# Altium PCB TP2_ESP8266.PcbDoc
Units mm, origin at the board's own origin, x right, y up, seen from the top; angles counter-clockwise.
Board outline 60 x 60 mm, 2 copper layers (Top Layer, Bottom Layer); 33 components, 33 nets, 115 pads, 25 vias.
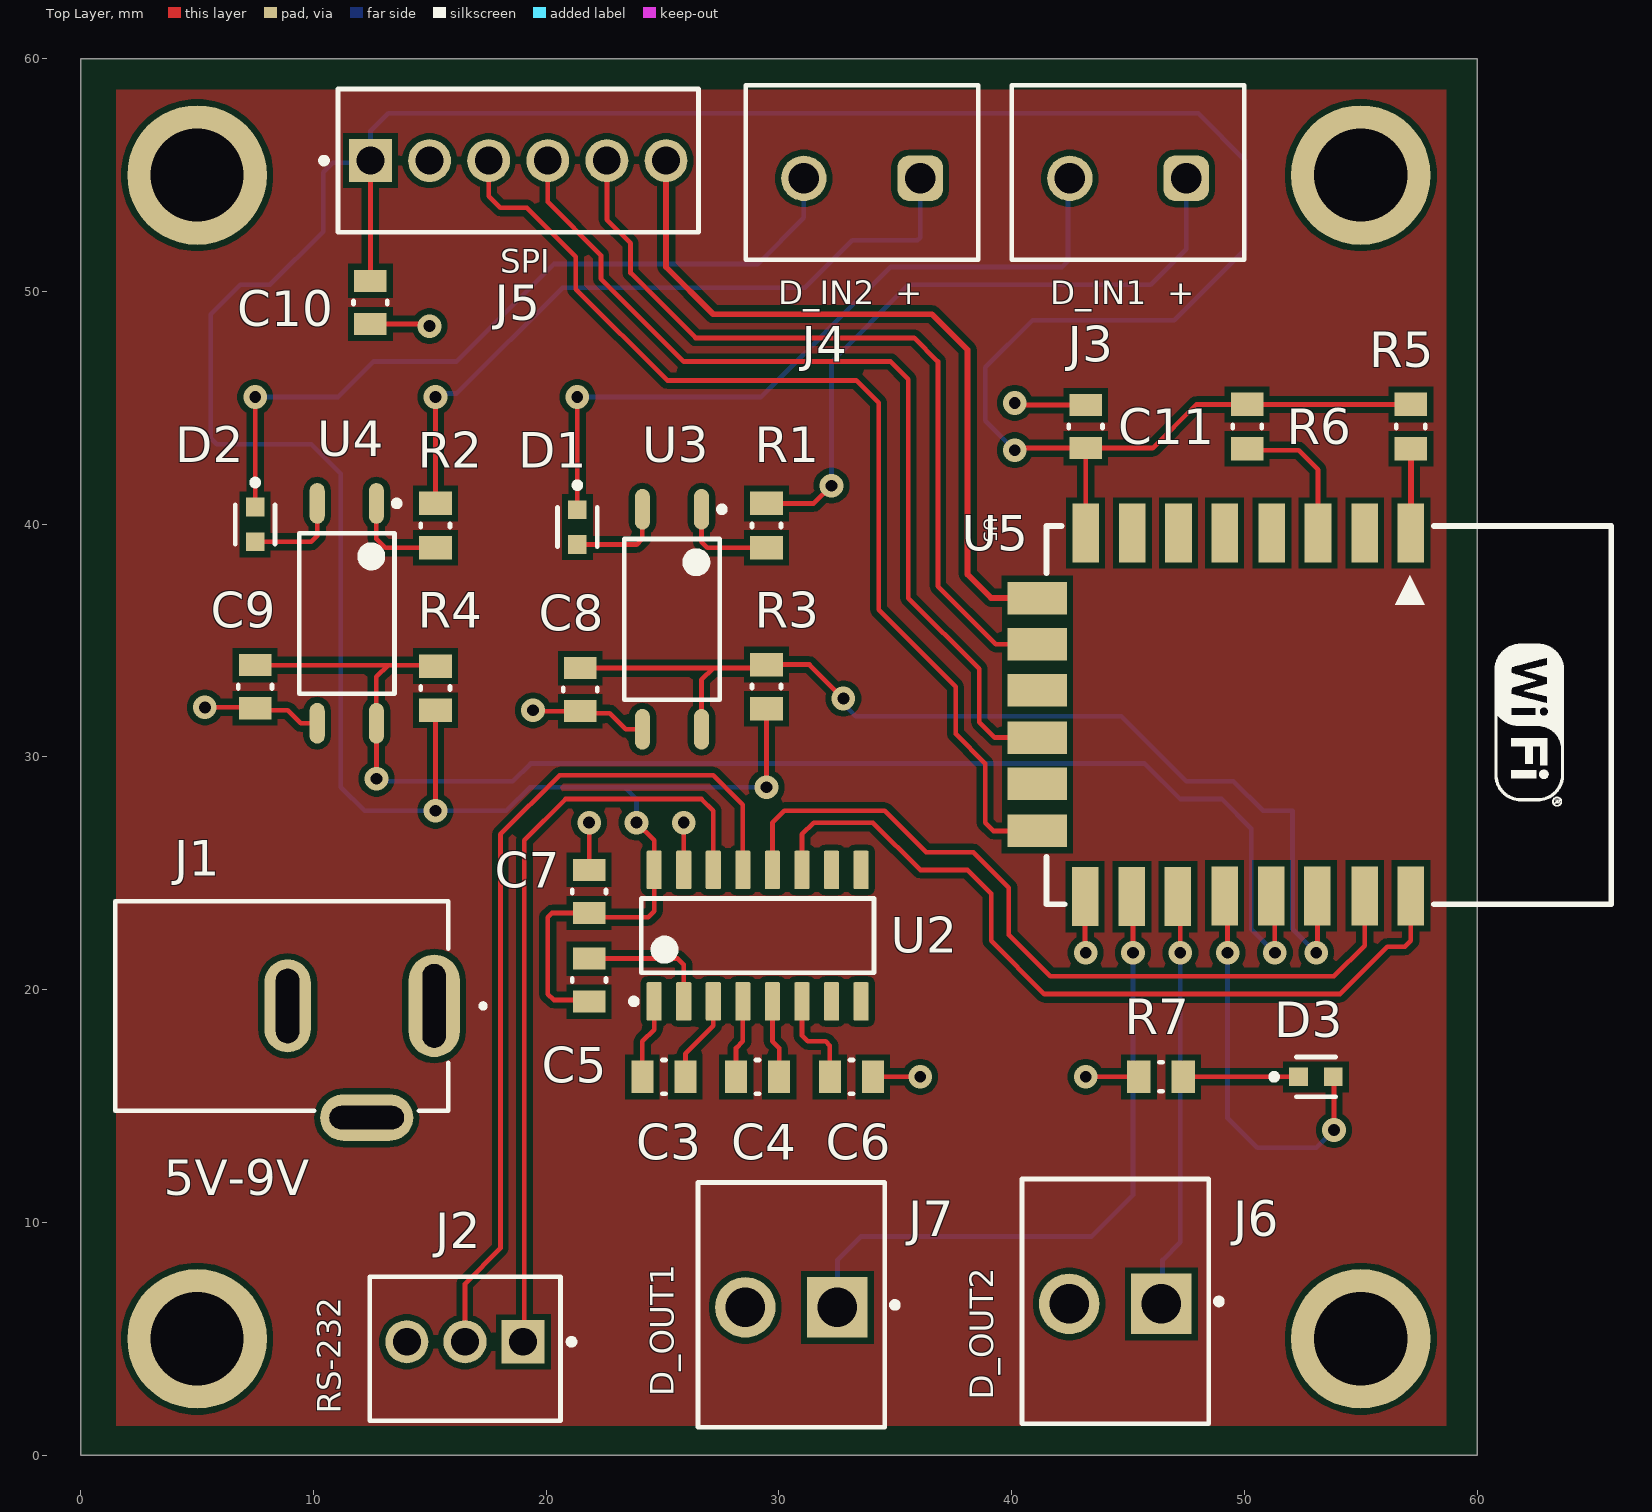
[diagram p0: Top Layer view]
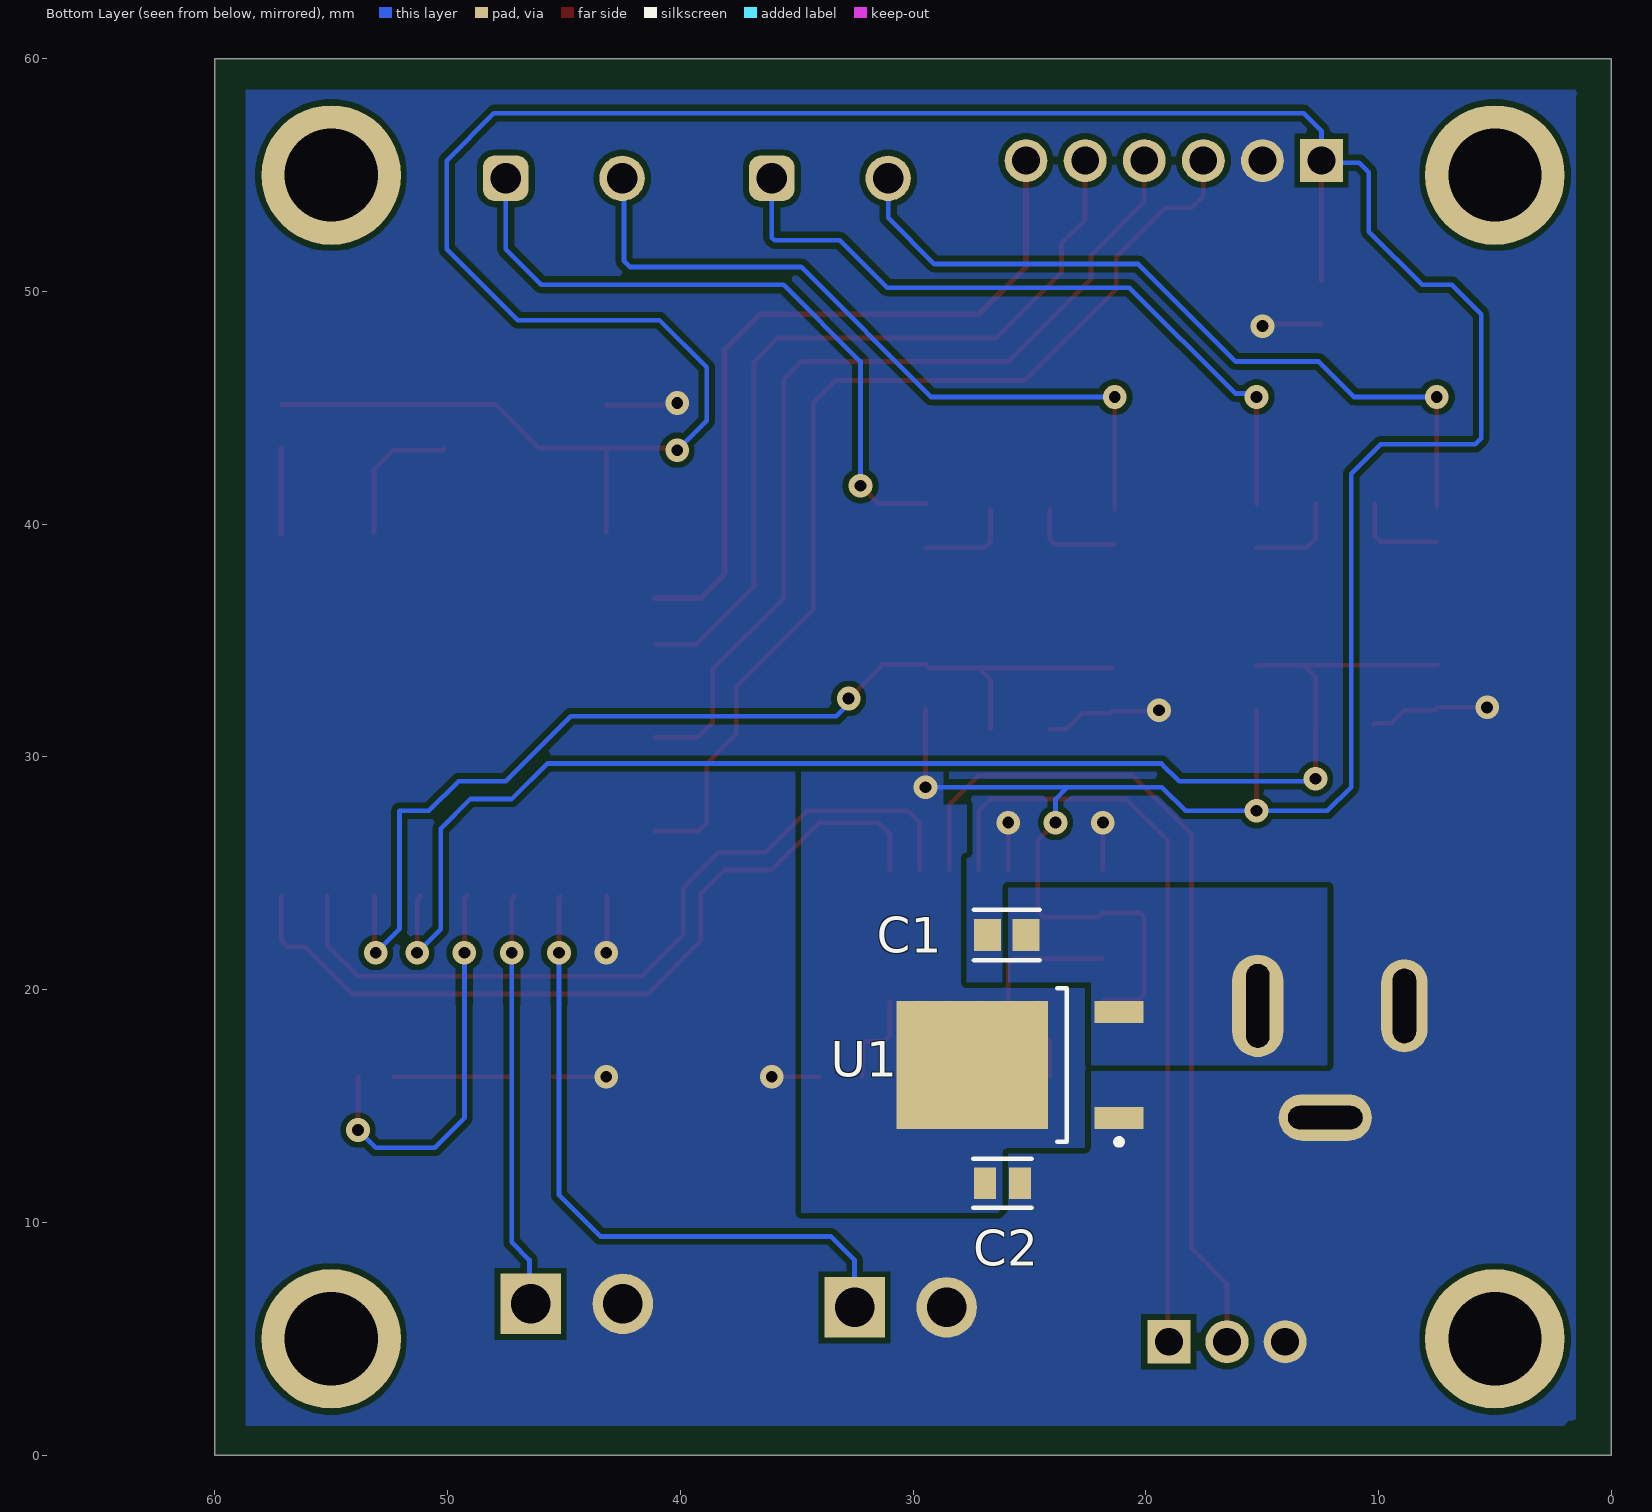
[diagram p1: Bottom Layer view, seen from below]
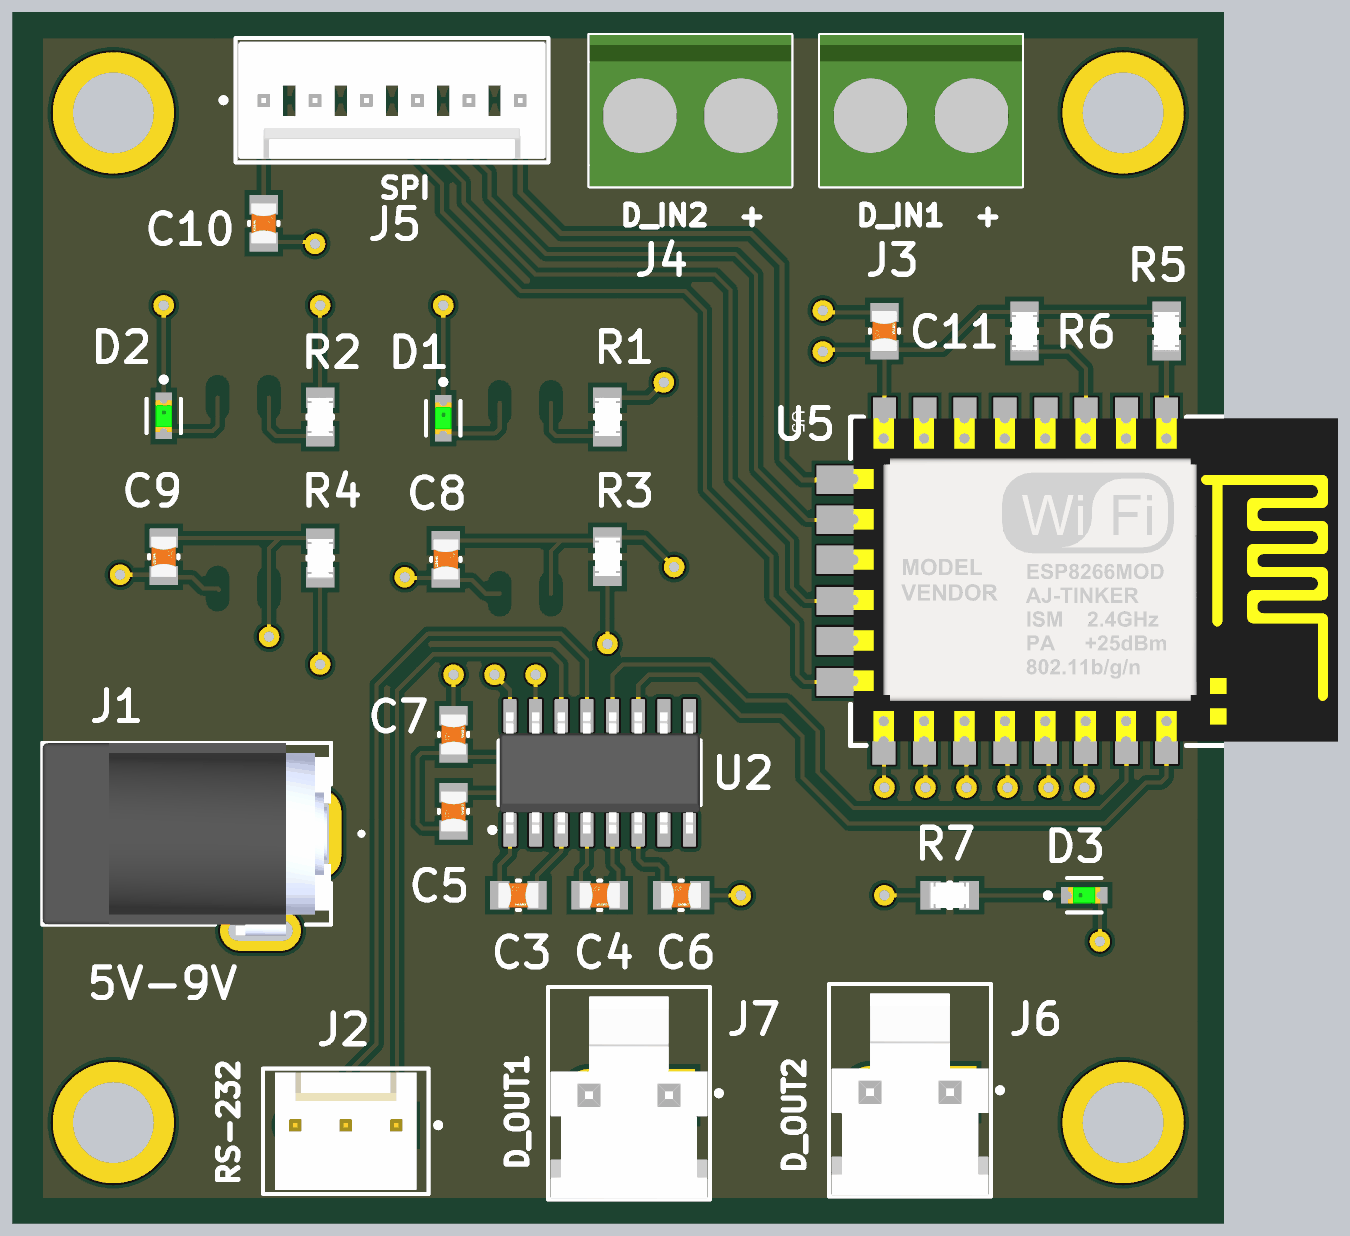
[diagram p2: 3D render of the assembled board from above, using the file's embedded part models]

## Layer stack, top to bottom
Top Solder: solder mask 0.0102, Solder Resist, Dk 3.5
Top Layer: signal copper 0.0356
Dielectric 1: dielectric 0.32, FR-4, Dk 4.8
Bottom Layer: signal copper 0.0356
Bottom Solder: solder mask 0.0102, Solder Resist, Dk 3.5

## Board outline
0,0 0,60 60,60 60,0

## Design rules (kind name [scope] priority, off if disabled: settings)
Clearance SPI_clearance [InNetClass('SPI_BUS')] p1: gap=0.254 ignorepadtopadclearanceinfootprint=FALSE except(0.61: Arc-Arc Arc-Track Arc-SMDPad Arc-THPad Track-Track Track-SMDPad Track-THPad)
Clearance default_clearance [All] p2: gap=0.254 ignorepadtopadclearanceinfootprint=FALSE
FabricationTestpoint [All] p1: side=3 testpointundercomponent=TRUE minsize=1.016 maxsize=5.08 preferedsize=1.524 minholesize=0 maxholesize=1.016 preferedholesize=0.813 testpointgrid=0.025 allowsidetop=TRUE allowsidebottom=TRUE usegrid=TRUE gridtolerance=0
PolygonConnect [All] p1: connectstyle=Direct reliefconductorwidth=0.254 reliefentries=4 polygonreliefangle="90 Angle" airgapwidth=0.254
RoutingVias [All] p1: holewidth=0.508 width=1.016 viastyle="Through Hole" minholewidth=0.406 minwidth=0.711 maxholewidth=0.711 maxwidth=1.27
SilkToSolderMaskClearance [IsPad] p1: minsilkscreentomaskgap=0.127 clearancetoexposedcopper=TRUE
SolderMaskExpansion [All] p1: expansion=0.102 istentingtop=FALSE
SupplyNets "Schematic Supply Nets_2" [InNet('Vin')] p1: voltage=0.000
SupplyNets "Schematic Supply Nets_1" [InNet('3V3')] p2: voltage=0.000
SupplyNets "Schematic Supply Nets" [InNet('GND')] p3: voltage=0.000
Width [All] p1: maxlimit=2.032 minlimit=0.203 preferedwidth=0.254 minimp=50.000000 maximp=50.000000 favimp=50.000000
28 further rules are at their usual default settings.

## Classes and differential pairs
net class SPI_BUS: SPI_CLK SPI_CS SPI_MISO SPI_MOSI
component class "SPI/ Digital_Outputs": C10 J5 J6 J7
component class RS-232: C3 C4 C5 C6 C7 J2 U2
component class "Regulador LDO": C1 C2 J1 U1
component class ESP8266: C11 D3 R5 R6 R7 U5
component class "Digital Inputs": C8 C9 D1 D2 J3 J4 R1 R2 R3 R4 U3 U4

## Components (designator, comment, footprint, x,y, rotation, side; value= is the part's Value field where it differs from the comment)
C1 "0.1u" FP-GRM21B-0_1-IPC_B 25.973,22.352 r0 bottom
C2 "10u" FP-C0805C106J8RACAUTO-MFG 26.162,11.684 r180 bottom
C3 "CC0805KRX7R8BB104" FP-CC0805-0_85-MFG 25.055,16.256 r0 top value=0.1u
C4 "CC0805KRX7R8BB104" FP-CC0805-0_85-MFG 29.083,16.256 r0 top value=0.1u
C5 "CC0805KRX7R8BB104" FP-CC0805-0_85-MFG 21.844,20.411 r90 top value=0.1u
C6 "CC0805KRX7R8BB104" FP-CC0805-0_85-MFG 33.111,16.256 r0 top value=0.1u
C7 "CC0805KRX7R8BB104" FP-CC0805-0_85-MFG 21.844,24.221 r90 top value=0.1u
C8 "CC0805KRX7R8BB104" FP-CC0805-0_85-MFG 21.463,32.893 r270 top value=0.1u
C9 "CC0805KRX7R8BB104" FP-CC0805-0_85-MFG 7.493,33.02 r270 top value=0.1u
C10 "CC0805KRX7R8BB104" FP-CC0805-0_85-MFG 12.446,49.53 r270 top value=0.1u
C11 "CC0805KRX7R8BB104" FP-CC0805-0_85-MFG 43.18,44.196 r90 top value=0.1u
D1 "Green Led" FP-LTST-C190GKT-MFG 21.336,39.878 r270 top
D2 "Green Led" FP-LTST-C190GKT-MFG 7.493,39.993 r270 top
D3 "Green Led" FP-LTST-C190GKT-MFG 53.074,16.256 r0 top
J1 "DCJ200-10-A-XX-K_REVA" GCT_DCJ200-10-A-XX-K_REVA 8.636,19.304 r270 top
J2 "22-11-1031" FP-0022111031-MFG 16.51,4.572 r0 top
J3 "691137710002" 691137710002 44.998,55.114 r180 top
J4 "691137710002" 691137710002 33.568,55.114 r180 top
J5 "22-27-2061" FP-22-27-2061-MFG 18.796,55.626 r0 top
J6 "26-60-4020" FP-26-60-4020-MFG 44.45,6.604 r180 top
J7 "26-60-4020" FP-26-60-4020-MFG 30.532,6.455 r180 top
R1 "CRCW08054K70JNEA" FP-CRCW0805-e3-IPC_B 29.464,39.943 r270 top
R2 "CRCW08054K70JNEA" FP-CRCW0805-e3-IPC_B 15.24,39.943 r270 top
R3 "CRCW08054K70JNEA" FP-CRCW0805-e3-IPC_B 29.464,33.02 r270 top
R4 "CRCW08054K70JNEA" FP-CRCW0805-e3-IPC_B 15.24,32.955 r270 top
R5 "CRCW08054K70JNEA" FP-CRCW0805-e3-IPC_B 57.15,44.196 r270 top
R6 "CRCW08054K70JNEA" FP-CRCW0805-e3-IPC_B 50.117,44.196 r270 top
R7 "CRCW08054K70JNEA" FP-CRCW0805-e3-IPC_B 46.417,16.256 r180 top
U1 "LD1117DT33TR" TO-252_N 25.4,16.764 r0 bottom
U2 "MAX3232ECDR" D0016A_M 29.083,22.321 r90 top
U3 "PS2381-1Y-F3-AX" LSOP254P1020X230-4N 1295.4,-1234.085 r270 top
U4 "PS2381-1Y-F3-AX" LSOP254P1020X230-4N 1281.43,-1233.831 r270 top
U5 "ESP8266 ESP-12-E" "ESP8266 ESP-12-E" 40.742,23.038 r270 top

## Footprints (in the part's own frame and the unit in brackets; to place one, negate y for a bottom-side part, rotate by r counter-clockwise, add the part's x,y. Pads: shape width x height; smd on the part's side, far side on the other; paste and mask are expansions set on the pad)
691137710002 [mm] "Horizontal Cable Entry with Pressure Clamp, pitch 5mm, 02p"
  rrect50% 1.95x1.95 hole 1.3: 1(-2.5,0.25)
  round 1.95 hole 1.3: 2(2.5,0.25)
  silkscreen extent -5,-3.75 5,3.75, body extent -5,-3.75 5,3.75, height 11.6
D0016A_M [mm] "SOIC, 16-Leads, Body 10x4mm, Pitch 1.27mm, IPC Low Density"
  rrect15% 1.65x0.65 smd: 1(-2.825,4.445) 2(-2.825,3.175) 3(-2.825,1.905) 4(-2.825,0.635) 5(-2.825,-0.635) 6(-2.825,-1.905) 7(-2.825,-3.175) 8(-2.825,-4.445) 9(2.825,-4.445) 10(2.825,-3.175) 11(2.825,-1.905) 12(2.825,-0.635) 13(2.825,0.635) 14(2.825,1.905) 15(2.825,3.175) 16(2.825,4.445)
  silkscreen extent -2.95,-5 1.6,5.44, body extent -3,-4.95 3,4.95, height 1.59
"ESP8266 ESP-12-E" [mil] "ESP8266 ESP-12-E"
  rect 100x45 smd: 1(-653,646) 2(-653,568) 3(-653,489) 4(-653,411) 5(-653,331) 6(-653,253) 7(-653,175) 8(-653,96) 15(-38,95) 16(-38,174) 17(-38,252) 18(-39,331) 19(-39,410) 20(-39,488) 21(-39,568) 22(-39,646)
  rect 55x100 smd: 9(-543,14) 10(-465,14) 11(-387,14) 12(-307,14) 13(-229,14) 14(-149,14)
  silkscreen extent -665,30 -25,985, body extent -663,35 -33,980, height 104
FP-22-27-2061-MFG [mm]
  rect 1.84x1.84 hole 1.19 paste-2539.97 mask+0: 1(-6.35,0)
  round 1.84 hole 1.19 paste-2539.97 mask+0: 2(-3.81,0) 3(-1.27,0) 4(1.27,0) 5(3.81,0) 6(6.35,0)
  silkscreen extent -8.47,-3.08 7.75,3.08, body extent -7.85,-3.17 7.85,3.17, height 0.25
FP-26-60-4020-MFG [mm]
  rect 2.6x2.6 hole 1.7 paste-2539.97 mask+0: 1(-1.98,0.105)
  round 2.6 hole 1.7 paste-2539.97 mask+0: 2(1.98,0.105)
  silkscreen extent -4.58,-5.26 4.01,5.26, body extent -4.11,-5.36 4.11,5.36, height 0.25
FP-0022111031-MFG [mm]
  rect 1.85x1.85 hole 1.2 paste-2539.97 mask+0: 1(2.5,0.3)
  round 1.85 hole 1.2 paste-2539.97 mask+0: 2(0,0.3) 3(-2.5,0.3)
  silkscreen extent -4.1,-3.1 4.7,3.1, body extent -4.2,-3.2 4.2,3.2, height 0.25
FP-C0805C106J8RACAUTO-MFG [mm]
  rect 0.95x1.35 smd paste+0 mask+0: 1(-0.75,0) 2(0.75,0)
  silkscreen extent -1.25,-1.05 1.25,1.05, body extent -1,-0.63 1,0.63, height 1.45
FP-CC0805-0_85-MFG [mm]
  rect 0.95x1.4 smd paste+0 mask+0: 1(-0.925,0) 2(0.925,0)
  silkscreen extent -0.08,-0.72 0.08,0.72, body extent -1.6,-1.05 1.6,1.05, height 0.25
FP-CRCW0805-e3-IPC_B [mm]
  rect 1.007x1.408 smd paste+0 mask+0: 1(-0.951,0) 2(0.951,0)
  silkscreen extent -0.07,-0.63 0.07,0.63, body extent -1.7,-0.95 1.7,0.95, height 0.25
FP-GRM21B-0_1-IPC_B [mm]
  rect 1.158x1.362 smd paste+0 mask+0: 1(-0.827,0) 2(0.827,0)
  silkscreen extent -1.41,-1.08 1.41,1.08, body extent -1,-0.63 1,0.63, height 1.35
FP-LTST-C190GKT-MFG [mm]
  rect 0.8x0.8 smd paste+0 mask+0: 1(-0.75,0) 2(0.75,0)
  silkscreen extent -1.92,-0.85 0.85,0.85, body extent -1.25,-0.55 1.25,0.55, height 0.25
GCT_DCJ200-10-A-XX-K_REVA [mm]
  oval 4.4x2.2 hole 1 slot 3.6 at 0 deg: 1(0,6.55)
  oval 4x2 hole 1 slot 3.2 at 0 deg: 2(0,0.25)
  oval 2x4 hole 1 slot 3.2 at 90 deg: 3(4.8,3.65)
  silkscreen extent -4.5,-7.15 4.5,8.75, body extent -4.5,-7.15 5.05,7.15, height 11
LSOP254P1020X230-4N [mm] "LSOP, 4-Leads, Body 3.80x7.50mm, Pitch 2.54mm, IPC Medium Density"
  oval 1.75x0.65 smd mask+0.051: 1(-1274.725,-1268.73) 2(-1274.725,-1271.27) 3(-1265.275,-1271.27) 4(-1265.275,-1268.73)
  silkscreen extent -1274.85,-1272.05 -1266.55,-1267.73, body extent -1275.1,-1272.05 -1264.9,-1267.95, height 2.3
TO-252_N [mm] "D-PAK, 4-Leads, Body 6.1x6.5mm, Pitch 2.28mm, Lead Span 9.7mm, IPC Medium Density"
  rect 2.1x0.95 smd: 1(-4.25,2.28) 3(-4.25,-2.28)
  rect 6.5x5.5 smd: 4(2.05,0)
  silkscreen extent -4.37,-3.3 -1.6,3.43, body extent -2,-3.3 4.2,3.3, height 2.4

## Part data
C1: library part CMP-06035-037063-1, "Chip Multilayer Ceramic Capacitors for General Purpose, 0805, 0.10uF, U2J, -750ppm/°C, 5%, 10V", Capacitance=100nF, Case Code (Imperial)=0805, Case Code (Metric)=2012, Dielectric=U2J, Max Operating Temperature=125°C, Min Operating Temperature=-55°C, Package Quantity=3000, Tolerance=5%, Voltage Rating=10V, Case/Package=0805, Depth=1.25mm, Height=1.25mm, Length=2mm, Mount="Surface Mount", Packaging="Tape and Reel", Radiation Hardening=No, Termination=SMD/SMT, Thickness=0.053inch, Voltage Rating (DC)=10V, Width=0.049inch
C2: library part CMP-03020-034708-1, "CAP CER 10UF 10V X7R 0805", Capacitance=10uF, Case Code (Imperial)=0805, Case Code (Metric)=2012, Max Operating Temperature=125°C, Min Operating Temperature=-55°C, Ratings=AEC-Q200, Tolerance=5%, Voltage Rating=10V, Case/Package=0805, Mount="Surface Mount", Packaging="Tape and Reel", RoHS Compliant=Yes
C3 C4 C5 C6 C7 C8 C9 C10 C11: library part CMP-1036-04410-2, "CAP CER 0.1UF 25V X7R 0805", Capacitance="100 nF", Manufacturer=Yageo, Package=CC0805-0.85, Temperature="-30°C to +85°C", Temperature Characteristic=X7R, Temperature Range High=+85°C, Temperature Range Low=-30°C, Tolerance=0.1, Voltage Rating="25 V", Automotive=No, Category=Cap, ComponentLink2Description=Datasheet, ComponentLink2URL=http://www.yageo.com/documents/recent/UPY-GPHC_Y5V_6.3V-to-50V_8.pdf, Device Class L1="Passive Components", Device Class L2=Capacitors, Device Class L3="Ceramic Capacitors", Digikey Description="CAP CER 0.1UF 25V X7R 0805", Footprint Url=http://www.yageo.com/exep/pages/download/literatures/UPY-C_GEN_24.pdf, Height=0.95mm, Ipc Land Pattern Name=CAPC200125X85, Lead Free=Yes, Manufacturer Part Number=CC0805KRX7R8BB104, Material=Ceramic, Mouser Description="Multilayer Ceramic Capacitors MLCC - SMD/SMT 100nF 25V X7R 10%", Octopart=https://octopart.com/cc0805krx7r8bb104-yageo-39467766, RoHS=TRUE
D1 D2 D3: library part CMP-22017-000005-2, "LED GREEN CLEAR CHIP SMD LTST-C190GKT", Case Code (Imperial)=0603, Case Code (Metric)=1608, Color=Green, Forward Current=30mA, Forward Voltage=2.1V, Lens Color=Colorless, Max Operating Temperature=85°C, Min Operating Temperature=-55°C, Package Quantity=1, Power Dissipation=100mW, Reverse Voltage=5V, Test Current=10mA, Voltage=2V, Case/Package=0603, Depth=0.8mm, Dominant Wavelength=569nm, Height=0.8mm, Illumination Color=Green, Lead Free="Lead Free", Length=1.6mm, Lens Style=Clear, Lens Transparency=Clear, Luminous Intensity=6mcd, Mount="Surface Mount", Number of Elements=1, Number of LEDs=1, Number of Pins=2, Packaging="Tape and Reel", Power Rating=100mW, Radiation Hardening=No, Viewing Angle=130°, Wavelength=565nm, Width=0.8mm
J1: "Power Barrel Connector Jack 2.05mm ID (0.081), 5.50mm OD (0.217) Through Hole, Right Angle", Package=None, Check_prices=https://www.snapeda.com/parts/DCJ200-10-A-K1-K/Global+Connector+Technology/view-part/?ref=eda, MF="Global Connector Technology", MP=DCJ200-10-A-K1-K, SnapEDA_Link=https://www.snapeda.com/parts/DCJ200-10-A-K1-K/Global+Connector+Technology/view-part/?ref=snap
J2: library part CMP-00257-00247512-1, "22-11-1031 Mini-Latch™ Wire-to-Board Header, Vertical, with Friction Ramp, 3 Circuits, Gold (Au) Plating", Color=Natural, Contact Resistance=20mΩ, Current Rating=3A, Manufacturer Lifecycle Status=ACTIVE, Max Operating Temperature=105°C, Max Voltage Rating (DC)=250.25kV, Min Operating Temperature=-40°C, Voltage Rating=250V, Connector Type="Male Pin", Contact Gender=Male, Contact Material=Brass, Contact Mating Length=7.493mm, Contact Plating=Gold, Country of Origin=KR, Depth=4.9mm, Fastening Type=Friction, Gender=Male, Height=12.1mm, Housing Color=Natural, Housing Material=Nylon, Lead Free="Lead Free", Length=7mm, Lifecycle Status=Production, Mount="Through Hole", NexarPartId=247512, Number of Circuits=3, Number of Contacts=3, Number of Positions=3, Number of Rows=1, Orientation=Vertical, Packaging=Bulk, Pitch=2.5mm, Plating=Gold, Radiation Hardening=No, REACH SVHC=Unknown, RoHS=Compliant, Schedule B="8536694040, 8536694040", Termination=Solder
J3 J4: library part CMP-1502-03324-2, Current Rating=16A, Max Operating Temperature=120°C, Min Operating Temperature=-30°C, Voltage Rating=300V, Contact Material="Nickel, Tin", Height=11.6mm, Lead Pitch=5mm, NexarPartId=78871135, Number of Contacts=2, Number of Pins=2, Number of Rows=1, Packaging=Box, RoHS=Non-Compliant
J5: library part CMP-04776-000309-1, "CONN HEADER VERT 6POS 2.54MM", Color=Natural, Contact Resistance=10mR, Current Rating=4A, Flammability Rating="UL94 V-0", Housing Color=White, Max Operating Temperature=75°C, Max Voltage Rating (AC)=250V, Min Operating Temperature=0°C, Package Quantity=10000, Connector Type="Male Pin", Contact Material=Brass, Contact Mating Length=0.295inch, Contact Plating=Tin, Contact Type="Male Pin", Depth=5.8mm, Fastening Type=Friction, Gender=Male, Hole Diameter=1.02mm, Housing Material=Nylon, Lead Pitch=2.54mm, Length=15.24mm, Material=Nylon, Max Current Rating=4A, Mount="Through Hole", Number of Contacts=6, Number of Positions=6, Number of Rows=1, Orientation=Straight, Packaging=Bulk, Pitch=2.54mm, Radiation Hardening=No, REACH SVHC="No SVHC", Series=KK, Termination=Solder, Voltage Rating=250V, Voltage Rating (AC)=250V, Working Voltage=250V
J6 J7: library part CMP-04776-000303-1, "CONN HEADER VERT 2POS 3.96MM", Color=Natural, Contact Resistance=6mR, Current Rating=7A, Flammability Rating="UL94 V-0", Max Operating Temperature=75°C, Max Voltage Rating (AC)=250V, Min Operating Temperature=0°C, Package Quantity=1400, Approvals=UL, Contact Gender=Male, Contact Material=Brass, Contact Mating Length=0.45inch, Contact Plating=Tin, Contact Type="Male Pin", Depth=10.01mm, Fastening Type=Friction, Gender=Male, Glow Wire Compliant=Non-compliant, Height=14.73mm, Housing Color=Natural, Housing Material=Polyester, Lead Free="Lead Free", Length=7.77mm, Material=Polyester, Max Current Rating=7A, Mount="Through Hole", Number of Circuits=2, Number of Contacts=2, Number of Lines=1, Number of Poles=2, Number of Positions=2, Number of Rows=1, Orientation=Straight, Packaging=Bulk, Pitch=3.96mm, Radiation Hardening=No, RoHS Compliant=Yes, Series="KK® 41791", Termination=Solder, Voltage Rating=250V
R1 R2 R3 R4: library part CMP-2001-03967-2, "RES Thick Film, 4.7kΩ, 5%, 0.125W, 200ppm/°C, 0805", Case Code (Imperial)=0805, Case Code (Metric)=2012, Max Operating Temperature=155°C, Min Operating Temperature=-55°C, Package Quantity=5000, Power Rating=125mW, Resistance=820, Temperature Coefficient=200ppm/°C, Tolerance=5%, Voltage Rating=150V, Case/Package=0805, Composition="Thick Film", Contact Plating=Tin, Depth=1.25mm, Height=0.45mm, Length=2mm, Military Standard=Not, Mount="Surface Mount", Packaging="Tape and Reel", Radiation Hardening=No, Termination=SMD/SMT, Weight=0.000194oz, Width=1.25mm
R5 R6: library part CMP-2001-03967-2, "RES Thick Film, 4.7kΩ, 5%, 0.125W, 200ppm/°C, 0805", Case Code (Imperial)=0805, Case Code (Metric)=2012, Max Operating Temperature=155°C, Min Operating Temperature=-55°C, Package Quantity=5000, Power Rating=125mW, Resistance=10k, Temperature Coefficient=200ppm/°C, Tolerance=5%, Voltage Rating=150V, Case/Package=0805, Composition="Thick Film", Contact Plating=Tin, Depth=1.25mm, Height=0.45mm, Length=2mm, Military Standard=Not, Mount="Surface Mount", Packaging="Tape and Reel", Radiation Hardening=No, Termination=SMD/SMT, Weight=0.000194oz, Width=1.25mm
R7: library part CMP-2001-03967-2, "RES Thick Film, 4.7kΩ, 5%, 0.125W, 200ppm/°C, 0805", Case Code (Imperial)=0805, Case Code (Metric)=2012, Max Operating Temperature=155°C, Min Operating Temperature=-55°C, Package Quantity=5000, Power Rating=125mW, Resistance=1k, Temperature Coefficient=200ppm/°C, Tolerance=5%, Voltage Rating=150V, Case/Package=0805, Composition="Thick Film", Contact Plating=Tin, Depth=1.25mm, Height=0.45mm, Length=2mm, Military Standard=Not, Mount="Surface Mount", Packaging="Tape and Reel", Radiation Hardening=No, Termination=SMD/SMT, Weight=0.000194oz, Width=1.25mm
U1: library part CMP-0244-00088-1, "Fixed Low Drop Positive Voltage Regulator, 3.3V, 3-Pin DPAK, Tape and Reel", ComponentLink1Description="Manufacturer URL", ComponentLink1URL=http://www.st.com, ComponentLink2Description=Datasheet, ComponentLink2URL=http://www.st.com/internet/com/TECHNICAL_RESOURCES/TECHNICAL_LITERATURE/DATASHEET/CD00000544.pdf, DatasheetVersion=1/11/2011, PackageDescription="3-Pin Transistor Outline Package 2.28 mm Pitch, 9.7 mm Lead Span (DPAK)", PackageReference=TO-252, PackageVersion=2011
U3 U4: library part CMP-00572-25656563-1, "PS2381-1Y-F3-AX Optocoupler, Transistor, 5Kv, Lsop-4 Rohs Compliant: Yes", Case/Package=SOP, Collector Emitter Saturation Voltage=300mV, Collector Emitter Voltage (VCEO)=80V, Current Transfer Ratio=400%, Forward Current=60mA, Forward Voltage=1.4V, Max Operating Temperature=115°C, Min Operating Temperature=-40°C, Power Dissipation=250mW, Reverse Breakdown Voltage=6V, Mount="Surface Mount", NexarPartId=25656563, Number of Elements=1, Number of Pins=4, Packaging="Tape and Reel", RoHS=Compliant

## Free pads (board coordinates)
  round 6 hole 4 unplated: ""(5,5) ""(5,55) ""(55,5) ""(55,55)

## Via types
v1: diameter 1.016, hole 0.508, Top Layer to Bottom Layer, 25 vias

## Nets (pads, with @x,y where several pads share a name; then routed paths per layer and width w, separated by ;. In a path a pad name is that pad's centre, name@x,y a point inside that pad or via, vN(x,y) a via of type N, cw(c..) or ccw(c..) an arc to the next point about the centre after c; other vN are vias at no path point)
3V3: C2.1 C5.1 C7.1 C10.1 C11.1 J5.1 R3.2 R4.2 R5.1 R6.1 U1.4 U2.16 U5.8 | length 166.9
  Top Layer w0.203: C10.1 J5.1 ; v1(15.24,27.686) R4.2 ; C5.1 21.772,19.558 20.32,19.558 20.066,19.812 20.066,23.114 20.248,23.296 C7.1 22.026,23.114 24.384,23.114 24.638,23.368 U2.16 24.638,26.416 v1(23.876,27.178) ; v1(29.464,28.702) R3.2 ; v1(40.132,43.18) 40.223,43.271 C11.1 ; U5.8 C11.1 ; R5.1 R6.1 47.941,45.147 46.065,43.271 C11.1
  Bottom Layer w0.203: v1(23.876,27.178) 23.876,28.194 23.368,28.702 ; v1(29.464,28.702) 23.368,28.702 ; v1(40.132,43.18) 38.862,44.45 38.862,46.736 40.894,48.768 46.99,48.768 50.038,51.816 50.038,55.626 48.006,57.658 13.208,57.658 12.446,56.896 J5.1 12.192,55.88 11.848,55.536 10.832,55.536 10.414,55.118 10.414,52.578 8.128,50.292 6.858,50.292 5.588,49.022 5.588,43.688 5.842,43.434 9.906,43.434 11.176,42.164 11.176,28.702 12.192,27.686 v1(15.24,27.686) 18.288,27.686 19.304,28.702 23.368,28.702
BORN_IN1: J3.1 R1.1 | length 28.7
  Top Layer w0.203: R1.1 31.496,40.894 v1(32.258,41.656)
  Bottom Layer w0.203: v1(32.258,41.656) 32.258,46.99 35.56,50.292 45.974,50.292 47.498,51.816 J3.1
BORN_IN2: J4.1 R2.1 | length 30.8
  Top Layer w0.203: R2.1 v1(15.24,45.466)
  Bottom Layer w0.203: v1(15.24,45.466) 15.392,45.618 16.154,45.618 20.701,50.165 31.115,50.165 33.147,52.197 35.949,52.197 36.068,52.316 J4.1
C1+: C3.1 U2.1 | length 3.5
  Top Layer w0.203: C3.1 24.13,17.78 24.638,18.288 U2.1
C1-: C3.2 U2.3 | length 3.7
  Top Layer w0.203: C3.2 25.98,17.247 27.178,18.445 U2.3
C2+: C4.1 U2.4 | length 3.4
  Top Layer w0.203: C4.1 28.158,17.49 28.448,17.78 U2.4
C2-: C4.2 U2.5 | length 3.4
  Top Layer w0.203: U2.5 29.718,17.78 30.008,17.49 C4.2
DIGITAL_IN1: C8.1 R3.1 U3.4 U5.20 | length 45.3
  Top Layer w0.203: C8.1@21.437,33.844 C8.1 27.178,33.818 ; U3.4 26.67,33.31 27.178,33.818 ; v1(32.766,32.512) 31.307,33.971 R3.1 29.311,33.818 27.178,33.818 ; v1(53.086,21.59) 53.137,21.641 U5.20
  Bottom Layer w0.203: v1(32.766,32.512) 32.766,32.292 33.153,31.905 33.153,31.894 33.297,31.75 44.704,31.75 47.498,28.956 49.53,28.956 50.8,27.686 52.07,27.686 52.07,22.606 v1(53.086,21.59)
DIGITAL_IN2: C9.1 R4.1 U4.4 U5.19 | length 60.3
  Top Layer w0.203: C9.1@7.467,33.971 C9.1 13.208,33.945 ; v1(12.707,29.062) 12.703,29.065 12.703,31.441 U4.4 12.7,33.437 13.208,33.945 ; R4.1 15.201,33.945 13.208,33.945 ; U5.19 51.308,23.876 v1(51.308,21.59)
  Bottom Layer w0.203: v1(12.707,29.062) 12.812,28.956 18.563,28.956 19.325,29.718 45.72,29.718 47.244,28.194 49.022,28.194 50.292,26.924 50.292,22.606 v1(51.308,21.59)
DIGITAL_OUT1: J6.1 U5.17 | length 17.9
  Top Layer w0.203: U5.17 47.244,23.901 v1(47.244,21.59)
  Bottom Layer w0.203: J6.1 46.482,6.551 46.482,8.382 47.244,9.144 v1(47.244,21.59)
DIGITAL_OUT2: J7.1 U5.16 | length 28.7
  Top Layer w0.203: U5.16 45.212,23.952 v1(45.212,21.59)
  Bottom Layer w0.203: J7.1 32.512,8.382 33.528,9.398 43.434,9.398 45.212,11.176 v1(45.212,21.59)
EN: R6.2 U5.3 | length 6.1
  Top Layer w0.203: R6.2 50.182,43.18 52.324,43.18 53.162,42.342 U5.3
GND: C1.2 C2.2 C6.2 C7.2 C8.2 C9.2 C10.2 C11.2 J1.2 J1.3 J2.3 J5.2 J6.2 J7.2 R7.2 U1.1 U2.15 U3.3 U4.3 U5.15 | length 26.7
  Top Layer w0.203: v1(5.334,32.131) 7.457,32.131 C9.2 7.584,32.004 8.89,32.004 9.45,31.444 U4.3 U4.3@10.223,31.381 ; C10.2 14.895,48.605 v1(14.986,48.514) ; v1(19.431,32.004) 19.467,31.968 C8.2 21.554,31.877 22.733,31.877 23.42,31.19 U3.3 ; C7.2 v1(21.844,27.178) ; U2.15 v1(25.908,27.178) ; C6.2 v1(36.068,16.256) ; v1(40.132,45.212) 40.223,45.121 C11.2 ; U5.15 43.155,21.615 v1(43.18,21.59) ; v1(43.18,16.256) R7.2
LED_A1: D1.2 U3.2 | length 4.2
  Top Layer w0.203: D1.2 23.888,39.128 24.13,39.37 U3.2
LED_A2: D2.2 U4.2 | length 4.2
  Top Layer w0.203: D2.2@7.505,39.231 D2.2 9.906,39.243 10.16,39.497 U4.2
LED_K1: D1.1 J3.2 | length 31.9
  Top Layer w0.203: D1.1 v1(21.336,45.466)
  Bottom Layer w0.203: v1(21.336,45.466) 29.21,45.466 34.798,51.054 42.164,51.054 42.418,51.308 42.418,54.784 J3.2
LED_K2: D2.1 J4.2 | length 33.2
  Top Layer w0.203: D2.1 v1(7.493,45.466)
  Bottom Layer w0.203: v1(7.493,45.466) 11.049,45.466 12.573,46.99 16.129,46.99 20.32,51.181 29.083,51.181 31.068,53.166 J4.2
OPTO_IN1: R1.2 U3.1 | length 4.3
  Top Layer w0.203: U3.1 26.67,39.243 26.921,38.992 R1.2
OPTO_IN2: R2.2 U4.1 | length 4.2
  Top Layer w0.203: U4.1 12.7,39.37 13.078,38.992 R2.2
RS232_RX: J2.2 U2.13 | length 37.2
  Top Layer w0.203: J2.2 16.51,7.366 18.034,8.89 18.034,26.67 20.574,29.21 27.178,29.21 28.448,27.94 U2.13
RS232_TX: J2.1 U2.14 | length 33.2
  Top Layer w0.203: J2.1 19.05,4.912 19.05,26.416 20.828,28.194 26.67,28.194 27.178,27.686 U2.14
RST*: R5.2 U5.1 | length 3.6
  Top Layer w0.254: U5.1 R5.2
RX_1: U2.12 U5.21 | length 34.5
  Top Layer w0.203: U2.12 29.718,27.178 30.226,27.686 34.544,27.686 36.322,25.908 38.354,25.908 39.878,24.384 39.878,22.352 41.656,20.574 53.848,20.574 55.169,21.895 U5.21
SPI_CLK: J5.3 U5.14 | length 45.1
  Top Layer w0.203: J5.3 17.526,54.102 18.034,53.594 19.171,53.594 21.269,51.495 21.269,50.105 25.197,46.177 33.325,46.177 34.29,45.212 34.29,36.322 37.592,33.02 37.592,30.988 38.862,29.718 38.862,27.178 39.218,26.822 U5.14
SPI_CS: J5.4 U5.12 | length 39.8
  Top Layer w0.203: J5.4 20.066,53.848 22.352,51.562 22.352,50.546 25.908,46.99 34.798,46.99 35.56,46.228 35.56,36.83 38.608,33.782 38.608,31.496 39.268,30.836 U5.12
SPI_MISO: J5.5 U5.10 | length 35
  Top Layer w0.203: J5.5 22.606,53.086 23.622,52.07 23.622,50.8 26.416,48.006 35.814,48.006 36.83,46.99 36.83,37.338 39.319,34.849 U5.10
SPI_MOSI: J5.6 U5.9 | length 32.1
  Top Layer w0.254: J5.6 25.146,51.054 27.178,49.022 36.576,49.022 38.1,47.498 38.1,37.846 39.116,36.83 U5.9
STATE_LED_A: D3.2 U5.18 | length 17.3
  Top Layer w0.203: U5.18 49.276,23.901 v1(49.276,21.59) ; D3.2 53.848,16.232 v1(53.848,13.97)
  Bottom Layer w0.203: v1(49.276,21.59) 49.276,14.478 50.546,13.208 53.086,13.208 v1(53.848,13.97)
STATE_LED_K: D3.1 R7.1 | length 5
  Top Layer w0.203: R7.1 D3.1
TX_1: U2.11 U5.22 | length 35
  Top Layer w0.203: U2.11 30.988,26.67 31.496,27.178 34.036,27.178 36.068,25.146 38.1,25.146 39.116,24.13 39.116,22.098 41.402,19.812 54.102,19.812 56.134,21.844 56.896,21.844 57.15,22.098 U5.22
V+: C5.2 U2.2 | length 5.8
  Top Layer w0.203: C5.2 25.654,21.336 25.908,21.082 U2.2
V-: C6.1 U2.6 | length 4.2
  Top Layer w0.203: U2.6 30.988,18.034 31.242,17.78 32.004,17.78 32.186,17.598 C6.1
Vin: C1.1 J1.1 U1.3
pads on no net: U2.7 U2.8 U2.9 U2.10 U5.2 U5.4 U5.5 U5.6 U5.7 U5.11 U5.13

## Polygon pours and split planes (outlines as drawn)
GND on Bottom Layer "GND_L02_P009" (solid, pour order 9): 58.674,58.674 58.674,1.27 2.032,1.27 1.778,1.524 1.524,1.27 1.524,58.42 1.27,58.674 1.524,58.42 1.27,58.674
GND on Bottom Layer "GND_L02_P008" (solid, pour order 8): 2.032,58.166 58.166,58.166 58.166,1.778 2.032,1.778 1.778,2.032 2.032,2.286
3V3 on Bottom Layer "3V3_L02_P003" (solid, pour order 3): 25.908,10.414 25.908,12.954 22.352,12.954 22.352,20.32 27.686,20.32 27.686,27.94 34.798,27.94 34.798,10.414
GND on Bottom Layer "GND_L02_P002" (solid, pour order 2): 22.352,19.304 57.15,19.304 57.15,2.54 3.048,2.54 3.048,25.654 27.686,25.654 27.686,20.32 22.352,20.32 22.352,16.764 22.352,20.32
3V3 on Bottom Layer "3V3_L02_P004" (solid, pour order 4): 28.702,27.94 28.702,29.464 34.798,29.464 34.798,27.94
Vin on Bottom Layer "VIN_L02_P000" (solid, pour order 0): 12.192,16.764 12.192,24.384 25.908,24.384 25.908,20.32 22.352,20.32 22.352,16.764
no net on Top Layer "NONET_L01_P011" (solid, pour order 11): 1.524,58.674 58.674,58.674 58.674,1.27 1.524,1.27

## Silkscreen, mask and mechanical layers (free items; w line width, h text height)
Top Overlay:
  text "SPI" at 18.034,50.8 h1.02
  text "D_IN2  +" at 29.972,49.445 h1.02
  text "D_IN1  +" at 41.656,49.445 h1.02
  text "5V-9V" at 3.556,11.176 h1.52
  text "D_OUT1" at 25.485,2.54 h1.02 r90
  text "D_OUT2" at 39.201,2.371 h1.02 r90
  text "RS-232" at 11.176,1.778 h1.02 r90

## Text inside footprints (layer, text, board x,y; h text height)
U3: Top Assembly "IC?" at 25.451,35.864 h0.25 r270
U4: Top Assembly "IC?" at 11.481,36.118 h0.25 r270
U5: Top 3D Body "CUTOUT POLYGON" at 64.633,39.623 h0.25 r270; Top 3D Body "ANTENNA AREA" at 65.141,39.623 h0.25 r270